# EAGLE board hand_rev_1_1_a (EAGLE 9.4.2)
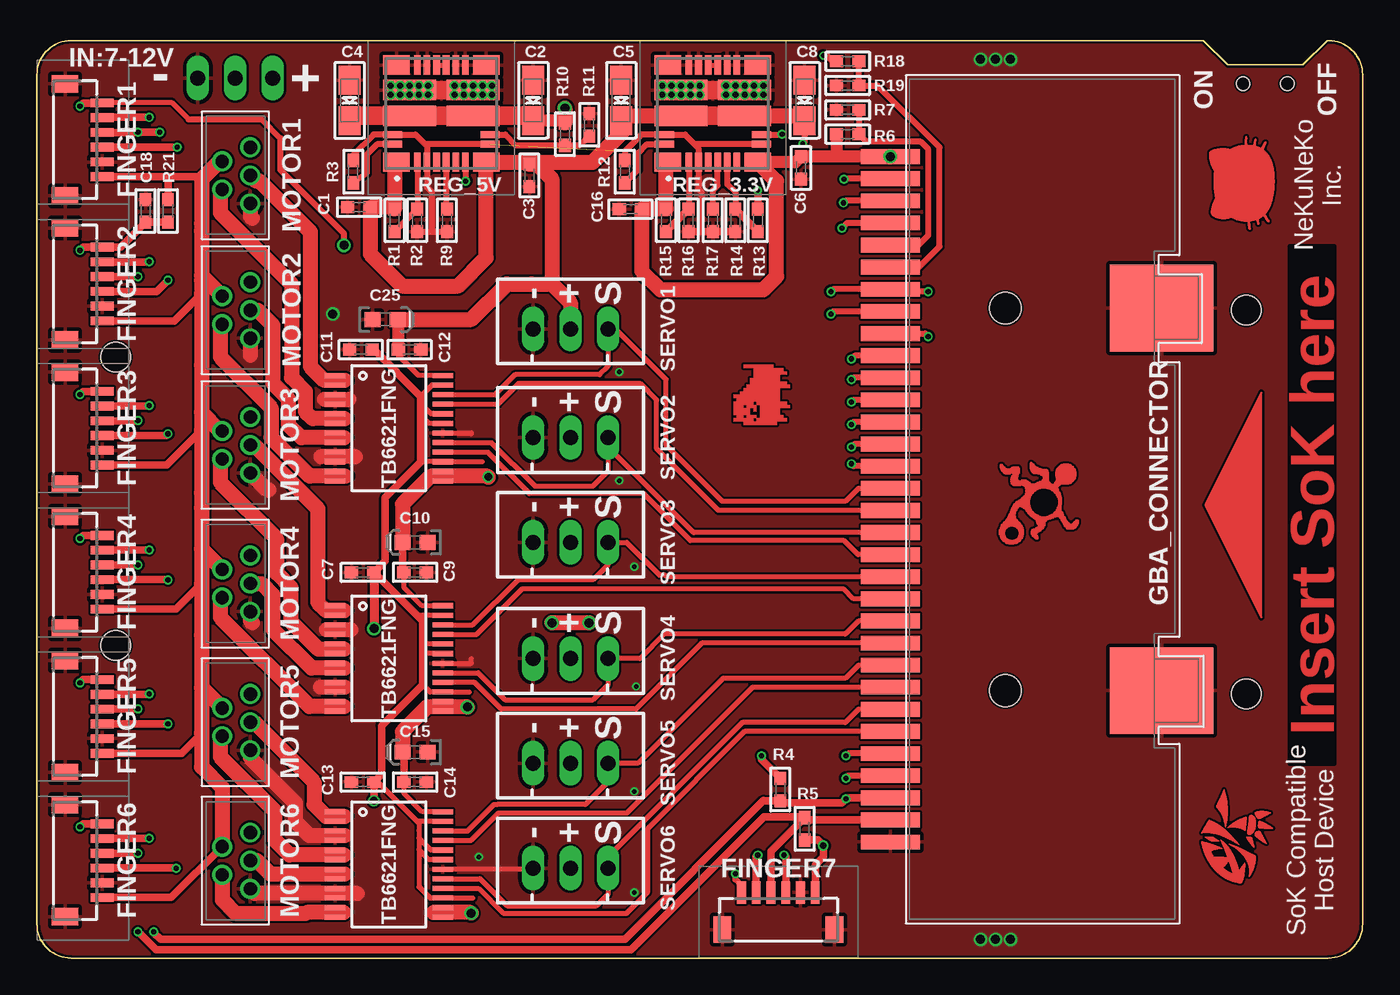
[diagram p0: board, top side]
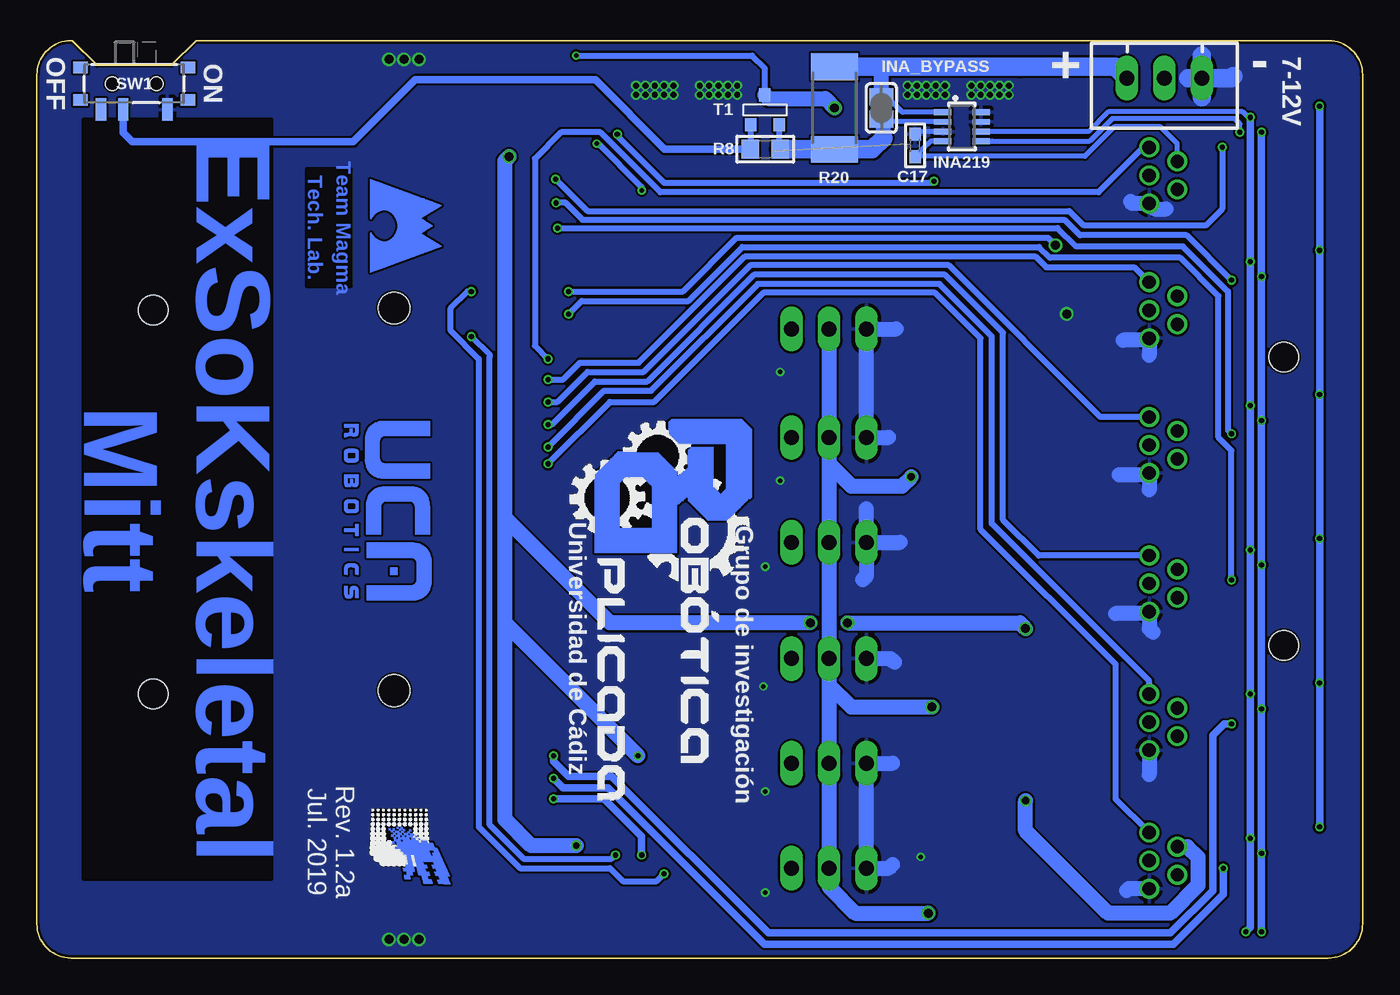
[diagram p1: board, bottom side, seen from below]

Size 89.92 x 62.23 mm. Coordinates in mm from the lower left corner, seen from the top.
Outline: 80.77,60.58 85.85,60.58 87.5,62.23 87.59,62.23 arc-90 89.92,59.91 89.92,2.32 arc-90 87.59,0 2.32,0 arc-90 0,2.32 0,59.91 arc-90 2.32,62.23 79.12,62.23 80.77,60.58
Copper layers (1*16): Top 0.035559375mm / dielectric 1.6mm / Bottom 0.035559375mm
Design rules "nekuneko": minimum track width 6mil, minimum drill 0.3mm, track to track 6mil, track to pad 6mil, pad to pad 6mil, via to via 6mil, smd to smd 6mil, copper to edge 6mil, drill to drill 6mil, minimum pad ring 5mil, minimum via ring 5mil, stop-mask expansion 2.5mil, vias tented up to drill 20mil, thermal gap 10mil
Net classes: 2 gnd: width 0.254 mm
Holes 2 mm at 82.04,43.94 82.04,17.91 5.33,21.21 5.33,40.77
tRestrict: 4 lines

## Footprints (pad centres in the part's own frame; a part is rotated, then mirrored left to right if it is on the bottom)
JST-XH-03-PACKAGE-LONG-PAD = drill 1.016 long: 1 -2.54,0; 2 0,0; 3 2.54,0
_0603 = smd 0.9 x 0.8: 1 -0.762,0; 2 0.762,0
EIA3216-18/A-R = smd 1.95 x 1.5: + 1.375,0; - -1.375,0
0603-POLAR = smd 1.1 x 1: + 0.85,0; - -0.85,0
MICROBUILDER__0603 = smd 0.9 x 0.8: 1 -0.762,0; 2 0.762,0
BM06BSRSSTBLFSN = smd 0.6 x 1.55: 1 -2.5,-1.65; 2 -1.5,-1.65; 3 -0.5,-1.65; 4 0.5,-1.65; 5 1.5,-1.65; 6 2.5,-1.65 | smd 1.2 x 1.8: MP1 -3.8,0.875; MP2 3.8,0.875
GBA_CARTRIDGE2 = smd 1 x 4: P$1 5.25,-1.3; P$2 6.75,-1.3; P$3 8.25,-1.3; P$4 9.75,-1.3; P$5 11.25,-1.3; P$6 12.75,-1.3; P$7 14.25,-1.3; P$8 15.75,-1.3; P$9 17.25,-1.3; P$10 18.75,-1.3; P$11 20.25,-1.3; P$12 21.75,-1.3; P$13 23.25,-1.3; P$14 24.75,-1.3; P$15 26.25,-1.3; P$16 27.75,-1.3; P$17 29.25,-1.3; P$18 30.75,-1.3; P$19 32.25,-1.3; P$20 33.75,-1.3; P$21 35.25,-1.3; P$22 36.75,-1.3; P$23 38.25,-1.3; P$24 39.75,-1.3; P$25 41.25,-1.3; P$26 42.75,-1.3; P$27 44.25,-1.3; P$28 45.75,-1.3; P$29 47.25,-1.3; P$30 48.75,-1.3; P$31 50.25,-1.3; P$32 51.75,-1.3 | smd 5.88 x 7: P$33 15.525,17.1; P$34 41.475,17.1 | hole 2.159: 41.475,6.504; 15.525,6.504
SOT23-8 = smd 0.4 x 1.2: 1 -0.975,-1.3; 2 -0.325,-1.3; 3 0.325,-1.3; 4 0.975,-1.3; 5 0.975,1.3; 6 0.325,1.3; 7 -0.325,1.3; 8 -0.975,1.3
SOLDERJUMPER_REFLOW_NOPASTE = smd 1.168 x 1.6: 1 -0.762,0; 2 0.762,0
5PIN = drill 0.9: 1 -1.905,0; 2 -0.953,1.905; 3 0,0; 4 0.953,1.905; 5 1.905,0
_0805 = smd 1.2 x 1.3: 1 -1.016,0; 2 1.016,0
2512 = smd 1.8 x 3.2: 1 -2.8,0; 2 2.8,0
TPSM84624MOLR = smd 1.3 x 1.8: 1 -3.3,3.05; 8 -3.3,-3.05; 13 3.3,-3.05; 20 3.3,3.05 | smd 1.3 x 0.45: 2 -3.3,1.625; 3 -3.3,0.975; 4 -3.3,0.325; 5 -3.3,-0.325; 6 -3.3,-0.975; 7 -3.3,-1.625; 14 3.3,-1.625; 15 3.3,-0.975; 16 3.3,-0.325; 17 3.3,0.325; 18 3.3,0.975; 19 3.3,1.625 | smd 0.45 x 1.3: 9 -2.075,-3.3; 10 -1.425,-3.3; 23 -1.425,3.3; 24 -2.075,3.3 | smd 1.4 x 3.6: 11 -0.15,-2.15; 12 1.6,-2.15; 21 1.6,2.15; 22 -0.15,2.15
SPDT_SMT_SSSS811101 = smd 0.7 x 1.5: A -2.25,1.75; B 0.75,1.75; C 2.25,1.75 | smd 1 x 0.8: SUP1 -3.65,1.1; SUP2 -3.65,-1.1; SUP3 3.65,1.1; SUP4 3.65,-1.1 | hole 0.9: -1.5,0; 1.5,0
SOT-23 = smd 0.787 x 0.889: 1 0.025,-1.016; 2 -0.94,1.016; 3 0.991,1.016
SSOP24 = smd 0.348 x 1.397: 1 -3.575,-3.656; 2 -2.925,-3.656; 3 -2.275,-3.656; 4 -1.625,-3.656; 5 -0.975,-3.656; 6 -0.325,-3.656; 7 0.325,-3.656; 8 0.975,-3.656; 9 1.625,-3.656; 10 2.275,-3.656; 11 2.925,-3.656; 12 3.575,-3.656; 13 3.575,3.656; 14 2.925,3.656; 15 2.275,3.656; 16 1.625,3.656; 17 0.975,3.656; 18 0.325,3.656; 19 -0.325,3.656; 20 -0.975,3.656; 21 -1.625,3.656; 22 -2.275,3.656; 23 -2.925,3.656; 24 -3.575,3.656

## Placement (x,y rotation side)
BATTERY  JST-XH-03-PIN-LONG-PAD  [JST-XH-03-PACKAGE-LONG-PAD]  13.46,59.69 180 bottom
C1  47uF  [_0603]  21.84,50.93 0 top
C2  10uF  [EIA3216-18/A-R]  33.66,58.17 270 top
C3  47uF  [_0603]  33.4,53.09 90 top
C4  10uF  [EIA3216-18/A-R]  21.21,58.17 270 top
C5  10uF  [EIA3216-18/A-R]  39.62,58.17 270 top
C6  47uF  [_0603]  51.82,53.59 90 top
C7  0.1uF  [_0603]  22.1,26.16 180 top
C8  10uF  [EIA3216-18/A-R]  52.07,58.17 270 top
C9  0.1uF  [_0603]  25.65,26.16 180 top
C10  10uF  [0603-POLAR]  25.65,28.19 180 top
C11  0.1uF  [_0603]  21.97,41.27 180 top
C12  0.1uF  [_0603]  25.27,41.27 180 top
C13  0.1uF  [_0603]  22.1,11.94 180 top
C14  0.1uF  [_0603]  25.65,11.94 180 top
C15  10uF  [0603-POLAR]  25.65,13.97 180 top
C16  47uF  [_0603]  40.26,50.8 0 top
C17  0.1uF  [_0603]  30.35,55.12 270 bottom
C18  1uF  [MICROBUILDER__0603]  7.37,50.67 270 top
C25  10uF  [0603-POLAR]  23.62,43.31 0 top
FINGER1  BM06B-SRSS-TB(LF)(SN)  [BM06BSRSSTBLFSN]  2.79,55.5 90 top
FINGER2  BM06B-SRSS-TB(LF)(SN)  [BM06BSRSSTBLFSN]  2.79,45.72 90 top
FINGER3  BM06B-SRSS-TB(LF)(SN)  [BM06BSRSSTBLFSN]  2.79,35.94 90 top
FINGER4  BM06B-SRSS-TB(LF)(SN)  [BM06BSRSSTBLFSN]  2.79,26.16 90 top
FINGER5  BM06B-SRSS-TB(LF)(SN)  [BM06BSRSSTBLFSN]  2.79,16.38 90 top
FINGER6  BM06B-SRSS-TB(LF)(SN)  [BM06BSRSSTBLFSN]  2.79,6.6 90 top
FINGER7  BM06B-SRSS-TB(LF)(SN)  [BM06BSRSSTBLFSN]  50.29,2.79 180 top
GBA_CONNECTOR  [GBA_CARTRIDGE2]  59.18,59.62 270 top
INA219  INA219BIDCNT  [SOT23-8]  27.18,56.39 270 bottom
INA_BYPASS  [SOLDERJUMPER_REFLOW_NOPASTE]  32.64,57.66 90 bottom
MOTOR1  Actuonix PQ12-100-06-P  [5PIN]  14.48,53.09 90 top
MOTOR2  Actuonix PQ12-100-06-P  [5PIN]  14.48,43.94 90 top
MOTOR3  Actuonix PQ12-100-06-P  [5PIN]  14.48,34.8 90 top
MOTOR4  Actuonix PQ12-100-06-P  [5PIN]  14.48,25.4 90 top
MOTOR5  Actuonix PQ12-100-06-P  [5PIN]  14.48,16 90 top
MOTOR6  Actuonix PQ12-100-06-P  [5PIN]  14.48,6.6 90 top
R1  10k  [_0603]  24.26,50.04 90 top
R2  1.37k  [_0603]  25.78,50.04 90 top
R3  40.2k  [_0603]  21.46,53.34 270 top
R4  4.7k  [_0603]  50.42,11.43 270 top
R5  4.7k  [_0603]  52.07,8.76 90 top
R6  10k  [_0603]  54.99,55.88 0 top
R7  33k  [_0603]  54.99,57.53 180 top
R8  10K  [_0805]  40.51,54.86 0 bottom
R9  4.42k  [_0603]  27.81,50.04 90 top
R10  68.1k  [_0603]  35.81,55.88 90 top
R11  16.9k  [_0603]  37.47,56.52 270 top
R12  48.7k  [_0603]  39.88,53.34 270 top
R13  27k  [_0603]  48.9,50.04 90 top
R14  6.2k  [_0603]  47.37,50.04 90 top
R15  10k  [_0603]  42.67,50.04 90 top
R16  2.21k  [_0603]  44.2,50.04 90 top
R17  4.42k  [_0603]  45.85,50.04 90 top
R18  51k  [_0603]  54.99,60.83 180 top
R19  33k  [_0603]  54.99,59.18 0 top
R20  0.1/1% (PT2512FK-070R1L)  [2512]  35.81,57.66 90 bottom
R21  10k  [_0603]  8.89,50.67 270 top
REG_3.3V  TPSM84624MOLR  [TPSM84624MOLR]  45.85,57.28 90 top
REG_5V  TPSM84624MOLR  [TPSM84624MOLR]  27.43,57.28 90 top
SERVO1  JST-XH-03-PIN-LONG-PAD  [JST-XH-03-PACKAGE-LONG-PAD]  36.2,42.67 0 top
SERVO2  JST-XH-03-PIN-LONG-PAD  [JST-XH-03-PACKAGE-LONG-PAD]  36.2,35.31 0 top
SERVO3  JST-XH-03-PIN-LONG-PAD  [JST-XH-03-PACKAGE-LONG-PAD]  36.2,28.19 0 top
SERVO4  JST-XH-03-PIN-LONG-PAD  [JST-XH-03-PACKAGE-LONG-PAD]  36.2,20.32 0 top
SERVO5  JST-XH-03-PIN-LONG-PAD  [JST-XH-03-PACKAGE-LONG-PAD]  36.2,13.21 0 top
SERVO6  JST-XH-03-PIN-LONG-PAD  [JST-XH-03-PACKAGE-LONG-PAD]  36.2,6.1 0 top
SW1  [SPDT_SMT_SSSS811101]  83.31,59.31 180 bottom
T1  DMP3098L-7  [SOT-23]  40.51,57.53 180 bottom
TB6621FNG  TB6621FNG  [SSOP24]  23.88,6.35 270 top
U1  TB6621FNG  [SSOP24]  23.88,35.94 270 top
U3  TB6621FNG  [SSOP24]  23.88,20.32 270 top
U$6  [NEKO_6_5_BORDE_TSTOP]  83.95,49.4 90 top
U$7  [SOK_FINISH]  84.07,4.95 90 top
U$8  [DOG_FINISH]  51.31,35.94 90 top
U$9  [MAGMA]  67.31,52.83 270 bottom
U$14  [UCAROBOTICS]  69.34,36.7 270 bottom
U$48  [GIRA_2_DRAWN_14]  54.36,36.7 270 bottom
U$50  [TRIANGLE]  79.25,30.73 0 top
U$51  [DIGIMON]  67.31,10.16 270 bottom
U$52  [BUGS_6]  70.87,27.81 90 top

## Library data of the parts
BATTERY SERVO1-SERVO6 = JST XH Connectors v1-0
C1-C9 C11-C14 C16 C17 INA219 INA_BYPASS R1-R21 SW1 = microbuilder
C10 C15 C25 = SparkFun-Capacitors; MPN: F981A106MMA; PROD_ID: CAP-13210
C18 = m0express
FINGER1-FINGER7 = 0SoK; DESCRIPTION: connector,multipole PCB use,BM06B-SRSS-T JST SH Series, 1mm Pitch 6 Way 1 Row Straight PCB Header, Solder Termination, 1A; HEIGHT: 4.25mm; MANUFACTURER_NAME: JST (JAPAN SOLDERLESS TERMINALS); MANUFACTURER_PART_NUMBER: BM06B-SRSS-TB(LF)(SN); RS_PART_NUMBER: 5468782; RS_PRICE-STOCK: https://uk.rs-online.com/web/p/products/5468782
GBA_CONNECTOR MOTOR1-MOTOR6 = 0SoK
REG_3.3V REG_5V = TPSM84624MOLR; DESCRIPTION: 4.5V to 17V Input, 0.6V-10V Output, 6A Power Module in Compact 7.5x7.5mm Footprint; HEIGHT: 5mm; MANUFACTURER_NAME: Texas Instruments; MANUFACTURER_PART_NUMBER: TPSM84624MOLR; MOUSER_PART_NUMBER: 595-TPSM84624MOLR
T1 = zetex; OC_FARNELL: unknown; OC_NEWARK: unknown
TB6621FNG U1 U3 = SparkFun
U$6-U$9 U$14 U$48 U$50-U$52 = 0Logos

## Nets
3.3V: C6.2 C7.1 C11.1 C13.1 C16.2 C17.2 FINGER1.1 FINGER2.1 FINGER3.1 FINGER4.1 FINGER5.1 FINGER6.1 FINGER7.1 GBA_CONNECTOR.P$1 INA219.4 MOTOR1.4 MOTOR2.4 MOTOR3.4 MOTOR4.4 MOTOR5.4 MOTOR6.4 R4.1 R5.1 R6.1 R15.2 R21.1 REG_3.3V.1 REG_3.3V.8 TB6621FNG.15 TB6621FNG.19 TB6621FNG.20 TB6621FNG.23 U1.15 U1.19 U1.20 U1.23 U3.15 U3.19 U3.20 U3.23
5.0V: C1.2 C3.2 C5.+ C8.+ C9.2 C10.+ C12.2 C14.2 C15.+ C25.+ R1.2 R13.2 REG_3.3V.11 REG_3.3V.22 REG_5V.1 REG_5V.8 SERVO1.2 SERVO2.2 SERVO3.2 SERVO4.2 SERVO5.2 SERVO6.2 TB6621FNG.13 TB6621FNG.14 TB6621FNG.24 U1.13 U1.14 U1.24 U3.13 U3.14 U3.24
AGND: R2.1 R3.1 R9.1 R12.1 R14.1 R16.1 R17.1 REG_3.3V.3 REG_3.3V.9 REG_3.3V.23 REG_5V.3 REG_5V.9 REG_5V.23
BATTERY_MONITOR: GBA_CONNECTOR.P$6 R18.1 R19.2
EN_3.3V: REG_3.3V.10 REG_5V.7
EN_5V: R10.1 R11.2 REG_5V.10
FB_3.3V: R15.1 R16.2 REG_3.3V.2
FB_5V: R1.1 R2.2 REG_5V.2
FINGER_!RESET: C18.2 FINGER1.6 FINGER2.6 FINGER3.6 FINGER4.6 FINGER5.6 FINGER6.6 FINGER7.6 GBA_CONNECTOR.P$7 R21.2
FINGER_INT1: FINGER1.3 GBA_CONNECTOR.P$2
FINGER_INT2: FINGER2.3 GBA_CONNECTOR.P$3
FINGER_INT3: FINGER3.3 GBA_CONNECTOR.P$4
FINGER_INT4: FINGER4.3 GBA_CONNECTOR.P$8
FINGER_INT5: FINGER5.3 GBA_CONNECTOR.P$28
FINGER_INT6: FINGER6.3 GBA_CONNECTOR.P$29
FINGER_INT7: FINGER7.3 GBA_CONNECTOR.P$9
GND [gnd]: BATTERY.1 C1.1 C2.- C3.1 C4.- C5.- C6.1 C7.2 C8.- C9.1 C10.- C11.2 C12.1 C13.2 C14.1 C15.- C16.1 C17.1 C18.1 C25.- FINGER1.2 FINGER1.MP1 FINGER1.MP2 FINGER2.2 FINGER2.MP1 FINGER2.MP2 FINGER3.2 FINGER3.MP1 FINGER3.MP2 FINGER4.2 FINGER4.MP1 FINGER4.MP2 FINGER5.2 FINGER5.MP1 FINGER5.MP2 FINGER6.2 FINGER6.MP1 FINGER6.MP2 FINGER7.2 FINGER7.MP1 FINGER7.MP2 GBA_CONNECTOR.P$32 GBA_CONNECTOR.P$33 GBA_CONNECTOR.P$34 INA219.3 INA219.7 INA219.8 MOTOR1.1 MOTOR2.1 MOTOR3.1 MOTOR4.1 MOTOR5.1 MOTOR6.1 R7.2 R11.1 R19.1 REG_3.3V.12 REG_3.3V.13 REG_3.3V.14 REG_3.3V.15 REG_3.3V.18 REG_3.3V.19 REG_3.3V.20 REG_3.3V.21 REG_5V.12 REG_5V.13 REG_5V.14 REG_5V.15 REG_5V.18 REG_5V.19 REG_5V.20 REG_5V.21 SERVO1.1 SERVO2.1 SERVO3.1 SERVO4.1 SERVO5.1 SERVO6.1 SW1.A TB6621FNG.3 TB6621FNG.4 TB6621FNG.9 TB6621FNG.10 TB6621FNG.18 U1.3 U1.4 U1.9 U1.10 U1.18 U3.3 U3.4 U3.9 U3.10 U3.18
MT1_POT: GBA_CONNECTOR.P$10 MOTOR1.5
MT1A: MOTOR1.2 U1.5 U1.6
MT1B: MOTOR1.3 U1.1 U1.2
MT2_POT: GBA_CONNECTOR.P$11 MOTOR2.5
MT2A: MOTOR2.2 U1.11 U1.12
MT2B: MOTOR2.3 U1.7 U1.8
MT3_POT: GBA_CONNECTOR.P$12 MOTOR3.5
MT3A: MOTOR3.2 U3.5 U3.6
MT3B: MOTOR3.3 U3.1 U3.2
MT4_POT: GBA_CONNECTOR.P$13 MOTOR4.5
MT4A: MOTOR4.2 U3.11 U3.12
MT4B: MOTOR4.3 U3.7 U3.8
MT5_POT: GBA_CONNECTOR.P$14 MOTOR5.5
MT5A: MOTOR5.2 TB6621FNG.5 TB6621FNG.6
MT5B: MOTOR5.3 TB6621FNG.1 TB6621FNG.2
MT6_POT: GBA_CONNECTOR.P$15 MOTOR6.5
MT6A: MOTOR6.2 TB6621FNG.11 TB6621FNG.12
MT6B: MOTOR6.3 TB6621FNG.7 TB6621FNG.8
N$1: R8.1 SW1.B T1.3
N$2: REG_5V.16 REG_5V.17
N$3: R12.2 REG_3.3V.24
N$4: REG_3.3V.16 REG_3.3V.17
N$6: R3.2 REG_5V.24
PWM_MT1A: GBA_CONNECTOR.P$17 U1.21
PWM_MT1B_SERVO1: GBA_CONNECTOR.P$16 SERVO1.3 U1.22
PWM_MT2A_SERVO2: GBA_CONNECTOR.P$18 SERVO2.3 U1.17
PWM_MT2B: GBA_CONNECTOR.P$19 U1.16
PWM_MT3A: GBA_CONNECTOR.P$21 U3.21
PWM_MT3B_SERVO3: GBA_CONNECTOR.P$20 SERVO3.3 U3.22
PWM_MT4A_SERVO4: GBA_CONNECTOR.P$22 SERVO4.3 U3.17
PWM_MT4B: GBA_CONNECTOR.P$23 U3.16
PWM_MT5A: GBA_CONNECTOR.P$25 TB6621FNG.21
PWM_MT5B_SERVO5: GBA_CONNECTOR.P$24 SERVO5.3 TB6621FNG.22
PWM_MT6A_SERVO6: GBA_CONNECTOR.P$26 SERVO6.3 TB6621FNG.17
PWM_MT6B: GBA_CONNECTOR.P$27 TB6621FNG.16
SCL: FINGER1.4 FINGER2.4 FINGER3.4 FINGER4.4 FINGER5.4 FINGER6.4 FINGER7.4 GBA_CONNECTOR.P$31 INA219.5 R5.2
SDA: FINGER1.5 FINGER2.5 FINGER3.5 FINGER4.5 FINGER5.5 FINGER6.5 FINGER7.5 GBA_CONNECTOR.P$30 INA219.6 R4.2
SOK: GBA_CONNECTOR.P$5 R6.2 R7.1
SS/TR_3.3V: R13.1 R14.2 REG_3.3V.6
TT_3.3V: R17.2 REG_3.3V.5
TT_5V: R9.2 REG_5V.5
VBAT: INA219.2 INA_BYPASS.1 R8.2 R20.1 T1.2
VIN: C2.+ C4.+ R10.2 R18.2 REG_5V.11 REG_5V.22 T1.1
VLIPO: BATTERY.3 INA219.1 INA_BYPASS.2 R20.2

## Tracks (layer width: path | path; a pad name or v marks a point on that pad's centre or on a via)
3.3V  (via drill 0.35, 0.45, 0.5, 0.61)
  Top 0.35: 26.16,20.83 26.16,18.54 26.66,18.05 U3.15 29.33,18.05 | 26.16,20.83 26.16,21.08 26.16,21.34 | 26.16,21.34 26.16,21.84 26.16,22.86 26.16,23.11 26.03,23.25 U3.23 | U3.20 26.2,21.3 26.16,21.34 | U3.19 26.34,20.64 26.16,20.83 | 27.43,38.87 U1.23 26.8,38.87 26.04,38.1 | C13.1 23.11,11.94 25.4,9.65 25.65,9.4 | 25.91,8.13 25.91,8.64 25.91,9.14 25.65,9.4 | 25.91,8.13 25.91,7.37 | 25.91,7.37 25.91,4.83 26.66,4.08 TB6621FNG.15 29.58,4.08 | TB6621FNG.19 26.6,6.67 25.91,7.37 | TB6621FNG.20 26.71,7.33 25.91,8.13 | TB6621FNG.23 25.78,9.28 25.65,9.4 | U1.20 26.71,36.92 26.04,37.59 | U1.19 26.6,36.27 26.04,36.83 | 26.04,33.66 26.05,33.67 U1.15 30.21,33.67
  Top 0.508: MOTOR6.4 9.12,4.1 FINGER6.1 | 10.92,14.99 11.18,15.24 9.82,13.88 FINGER5.1 | 11.18,25.4 10.92,25.15 9.46,23.69 9.44,23.66 FINGER4.1 | 8.89,53 8.76,53 8,53 7.11,53 FINGER1.1 | 8.89,53 11.53,53 MOTOR1.4 | MOTOR5.4 12.45,17.08 | 26.16,22.86 C7.1 23.62,26.92 23.62,31.24 26.04,33.66 26.04,36.83 26.04,37.59 26.04,38.1 22.86,41.27 C11.1 | 26.16,23.11 26.16,18.54 23.37,15.75 23.37,12.45 C13.1 v22.86,10.67 | v49.15,13.72 49.15,13.46 R4.1 | R5.1 52.96,8 v53.34,7.62 53.34,6.86 52.79,6.31 FINGER7.1 | 42.67,53.85 REG_3.3V.1 | R21.1 8.89,53 | FINGER2.1 9.31,43.22 11.18,45.09 | FINGER3.1 8.8,33.44 11.18,35.81 11.18,37.02
  Top 0.61: C7.1 v22.86,22.35
  Top 0.813: 49.4,53.85 49.03,53.85 REG_3.3V.8 51.44,53.98 C6.2 54.36,54.37 | GBA_CONNECTOR.P$1 54.36,54.37 | R6.1 54.23,54.49 54.36,54.37
  Top 1.016: MOTOR1.4 12.38,54.04 11.18,52.83 11.18,49.85 | 11.18,49.85 11.18,46.29 MOTOR2.4 | 11.18,49.85 11.18,49.34 | 11.18,49.34 11.18,45.97 11.18,45.09 | 11.18,49.34 11.18,44.96 11.18,37.02 12.45,35.75 MOTOR3.4 | 11.18,31.56 11.18,35.81 11.18,40.2 | 11.18,31.56 11.18,27.75 MOTOR4.4 | 11.18,31.56 11.18,30.54 11.18,25.4 11.18,21.91 11.18,18.35 | MOTOR5.4 11.3,18.22 11.18,18.35 | MOTOR6.4 12.57,11.56 11.18,12.95 11.18,15.24 11.18,18.35 | v37.47,22.73 v34.92,22.73 | 42.54,53.98 REG_3.3V.1 42.67,53.85 R15.2 C16.2 41.02,46.61 42.29,45.34 49.28,45.34 50.16,46.23 50.16,52.71 REG_3.3V.8 | REG_3.3V.8 49.02,54.1 | 49.02,54.1 REG_3.3V.8
  Bottom 0.35: MOTOR1.4 12.57,55.24 13.72,56.39 16.83,56.39 18.84,54.38 30.33,54.38 | 28.04,55.41 INA219.4 29.3,55.41 29.82,54.89 30.33,54.38 | 30.33,54.38 C17.2
  Bottom 1.016: v53.34,7.62 56.39,7.62 58.17,9.4 58.17,22.73 | v22.86,22.35 23.24,22.73 v34.92,22.73 | v37.47,22.73 51.05,22.73 58.17,29.84 | MOTOR6.4 11.87,7.56 11.18,6.86 11.18,4.92 13.05,3.05 17.27,3.05 22.86,8.64 v22.86,10.67 | 58.17,22.73 58.17,29.84 | v49.15,13.72 49.91,14.48 58.17,22.73 | 58.17,29.84 58.17,54.08 GBA_CONNECTOR.P$1
  other vias: 57.88,54.37
5.0V  (via drill 0.3, 0.51, 0.61)
  Top 0.35: TB6621FNG.13 27.23,2.77 26.9,3.1 27.2,3.1 TB6621FNG.14 | U3.13 27.21,17.07 26.75,17.07 | 26.75,17.07 26.5,17.07 | U3.14 27.2,17.07 26.75,17.07 | TB6621FNG.24 26.14,9.93 24.89,11.18 C14.2 | U1.24 25.89,39.52 24.51,40.89 C12.2 | U3.24 26.14,23.89 24.89,25.15 C9.2 | U1.14 30.23,33.02 30.56,32.69 30.68,32.56 30.62,32.63 | v30.61,32.64 30.61,32.37 U1.13
  Top 0.406: C8.+ 52.07,55.37 v51.94,55.24
  Top 0.508: C14.2 24.89,13.88 C15.+ | C9.2 24.8,26.25 C10.+ | 24.26,53.85 REG_5V.1 | R13.2 v48.9,52.07
  Top 0.813: C25.+ 24.93,43.31 24.51,42.97 C12.2
  Top 1.016: v29.46,3.05 29.41,3.1 26.9,3.1 | v29.21,17.02 29.16,17.07 26.75,17.07 | 26.5,17.07 24.8,15.37 C15.+ | C10.+ 24.8,30.78 26.71,32.69 30.56,32.69 | v30.61,32.64 30.62,32.63 | C25.+ 29.46,43.31 31.88,45.72 33.53,45.72 34.92,45.72 | C5.+ 39.62,55.9 37.7,53.98 33.53,53.98 C3.2 | 39.67,57.13 REG_3.3V.22 | 34.92,45.72 36.2,44.45 SERVO1.2 | REG_5V.8 | REG_5V.1 24.26,53.85 R1.2 24.13,50.93 C1.2 22.61,47.75 24.77,45.59 28.57,45.59 30.48,47.5 REG_5V.8 | REG_5V.8 | REG_5V.8 33.27,53.98 C3.2 | REG_3.3V.11 51.73,57.13 C8.+ | C3.2 33.91,53.85 34.92,52.83 34.92,45.72
  Top 1.27: 43.67,57.15 REG_3.3V.22 REG_3.3V.11 48.04,57.17 | C5.+ 39.67,57.13
  Bottom 0.406: v48.9,52.07 48.9,52.3 51.89,55.29 v51.94,55.24
  Bottom 1.016: SERVO4.2 SERVO5.2 SERVO6.2 36.2,4.83 34.42,3.05 v29.46,3.05 | SERVO4.2 SERVO3.2 36.2,33.53 | 36.2,33.53 36.2,34.29 36.2,34.54 36.2,35.05 SERVO2.2 SERVO1.2 | SERVO4.2 36.2,18.54 34.67,17.02 v29.21,17.02 | 36.2,33.53 34.67,32 31.24,32 v30.61,32.64
AGND  (1 unrouted)
  Top 0.406: 25.68,55.85 REG_5V.23 22.83,55.85 21.46,54.48 R3.1 | 25.68,55.85 26.46,55.08 REG_5V.3 26.46,52.28 26.8,51.94 26.8,49.28 | REG_5V.9 26.33,55.2 25.68,55.85 | 43.97,55.85 REG_3.3V.23 40.99,55.85 39.88,54.74 R12.1 | 43.97,55.85 44.87,54.95 REG_3.3V.3 44.87,52.16 45.09,51.94 45.09,49.28 | REG_3.3V.9 44.62,55.2 43.97,55.85 | R2.1 26.8,49.28 | 26.8,49.28 R9.1
  Top 0.508: R14.1 R17.1 45.09,49.28 R16.1
  pour Top (isolate 0.012): 23.5,52.83 23.5,47.75 25.02,46.23 28.32,46.23 29.84,47.75 29.84,53.09 23.75,53.09
  pour Top (isolate 0.012): 41.66,53.09 41.66,46.86 42.55,45.97 49.02,45.97 49.53,46.48 49.53,52.58 49.02,53.09
BATTERY_MONITOR
  Top 0.406: GBA_CONNECTOR.P$6 59.64,46.69 61.21,48.26 61.21,54.99 57.02,59.18 R19.2 R18.1
EN_3.3V  (via drill 0.35)
  Top 0.406: REG_5V.7 29.08,53.95 v29.08,52.7 | REG_3.3V.10 50.52,55.85 v50.55,55.88
  Bottom 0.406: v29.08,52.7 29.21,52.58 47.37,52.58 50.55,55.75 v50.55,55.88
EN_5V
  Top 0.406: REG_5V.10 31.78,55.85 32.51,55.12 R10.1 36.83,55.12 R11.2
FB_3.3V
  Top 0.406: REG_3.3V.2 44.22,50.83 R16.2
  Top 0.508: R15.1 R16.2
FB_5V
  Top 0.406: REG_5V.2 25.81,50.83 R2.2 R1.1
FINGER_!RESET  (via drill 0.35, 0.61)
  Top 0.35: FINGER1.6 4.48,58.04 9.14,58.04 10.29,56.9
  Top 0.406: 10.29,56.9 15.24,56.9 16.51,55.63 16.51,53.47 20.83,49.15 20.83,48.61 v20.83,48.35 | 47.79,4.91 47.37,5.33 v47.37,5.71 | v60.45,45.21 57.91,45.21 GBA_CONNECTOR.P$7 54,45.37 v53.85,45.21
  Top 0.508: R21.2 C18.2 5.67,48.22 FINGER2.6 3.13,48.22 v2.92,48.01 | v2.92,8.89 3.13,9.1 FINGER6.6 | FINGER5.6 3.13,18.88 v2.92,18.67 | FINGER4.6 3.13,28.66 v2.92,28.45 | FINGER3.6 3.13,38.44 v2.92,38.23 | v2.92,57.78 3.13,58 FINGER1.6 | 47.79,4.91 FINGER7.6
  Bottom 0.406: v20.83,48.35 21.34,48.86 28.5,48.86 42.45,48.86 46.1,45.21 v53.85,45.21 | v60.45,45.21 60.71,45.21 61.85,44.07 61.85,42.55 59.94,40.64 59.94,8.89 57.15,6.1 51.05,6.1 50.16,5.21 47.88,5.21 v47.37,5.71
  Bottom 0.508: v2.92,8.89 v2.92,18.67 v2.92,28.45 v2.92,38.23 v2.92,48.01 v2.92,57.78
FINGER_INT1  (via drill 0.35)
  Top 0.406: GBA_CONNECTOR.P$2 54.77,52.87 v54.74,52.83
  Top 0.508: FINGER1.3 9.52,55 v9.53,54.99
  Bottom 0.406: v9.53,54.99 9.53,50.8 10.64,49.68 18.9,49.68 19.89,50.67 52.58,50.67 v54.74,52.83
FINGER_INT2  (via drill 0.35)
  Top 0.406: 57.84,51.23 GBA_CONNECTOR.P$3 54.83,51.37 v54.69,51.23
  Top 0.508: FINGER2.3 8.14,45.22 v8.89,45.97
  Bottom 0.406: v54.69,51.23 54.06,51.23 52.91,50.08 20.24,50.08 19.18,49.02 11.94,49.02 v8.89,45.97
FINGER_INT3  (via drill 0.35)
  Top 0.406: GBA_CONNECTOR.P$4 54.95,49.87 v54.6,49.52
  Top 0.508: FINGER3.3 8.77,35.44 v8.89,35.56
  Bottom 0.406: v8.89,35.56 9.14,35.81 9.14,45.21 12.19,48.26 19.43,48.26 20.69,49.52 v54.6,49.52
FINGER_INT4  (via drill 0.35)
  Top 0.406: v8.89,25.65 8.88,25.66 | 57.88,43.69 GBA_CONNECTOR.P$8 54.02,43.87 v53.85,43.69
  Top 0.508: 8.88,25.66 FINGER4.3
  Bottom 0.406: v53.85,43.69 52.96,44.58 45.72,44.58 42.06,48.23 21.95,48.23 21.21,47.5 12.38,47.5 9.78,44.9 9.78,35.31 8.89,34.42 v8.89,25.65
FINGER_INT5  (via drill 0.35)
  Top 0.406: GBA_CONNECTOR.P$28 55.01,13.87 v54.86,13.72
  Top 0.508: FINGER5.3 8.76,15.88 v8.88,15.88 v8.89,15.88
  Bottom 0.508: v54.86,13.72 54.86,13.34 53.85,12.32 50.93,12.32 40.31,1.7 13.03,1.7 10.16,4.57 10.16,15.11 9.4,15.88 v8.89,15.88
FINGER_INT6  (via drill 0.35)
  Top 0.406: GBA_CONNECTOR.P$29 55.04,12.37 v54.86,12.19
  Top 0.508: 57.88,12.19 GBA_CONNECTOR.P$29 | FINGER6.3 v9.44,6.1 v9.45,6.1
  Bottom 0.508: v9.45,6.1 9.45,4.32 12.83,0.94 40.56,0.94 51.18,11.56 54.23,11.56 v54.86,12.19
FINGER_INT7  (via drill 0.35)
  Top 0.406: GBA_CONNECTOR.P$9 60.25,42.37 v60.45,42.16
  Top 0.508: FINGER7.3 50.79,6.87 v50.67,6.99
  Bottom 0.406: v50.67,6.99 50.93,6.73 56.92,6.73 59.21,9.02 59.21,40.79 59.21,40.92 v60.45,42.16
GND  (via drill 0.3, 0.4, 0.61)
  Top 0.254: U1.4 19.9,37.89 19.5,37.89 19.83,38.22 U1.3
  Top 0.35: TB6621FNG.3 20.57,8.62 20.89,8.3 20.57,7.97 TB6621FNG.4 | SERVO6.1 33.58,6.03 TB6621FNG.18 | U3.9 20.55,18.7 20.89,18.36 20.53,18.36 U3.10 | U3.18 29.46,20 29.46,20.32 | U1.18 29.46,35.62 29.46,35.57
  Top 1.016: MOTOR5.1 14.48,13.59 17.53,10.54 17.53,9.27 18.5,8.3 20.89,8.3 | 21.73,4.39 14.79,4.39 MOTOR6.1 | 14.48,23.11 MOTOR4.1 14.48,22.88 14.61,22.74 | 20.89,18.36 19.23,18.36 | MOTOR2.1 14.48,40.89 | 21.29,22.27 19.63,22.27 | 19.5,37.89 21.16,37.89 | 21.59,34 19.25,34 | MOTOR1.1 14.48,50.31 14.61,50.17 | MOTOR3.1 15.62,31.75 15.75,31.75
  Top 1.27: REG_5V.12 REG_5V.21 | REG_3.3V.12 REG_3.3V.21
  Bottom 0.35: INA219.3 30.17,56.06 C17.1
  Bottom 1.016: MOTOR6.1 15.88,4.7 16,4.57 | MOTOR5.1 14.48,12.45 | 14.22,22.1 14.48,22.35 MOTOR4.1 14.61,23.37 16.76,23.37 | 14.48,31.75 MOTOR3.1 14.61,32.77 16.51,32.77 | 14.48,40.89 MOTOR2.1 14.61,41.91 16.26,41.91 | SERVO4.1 32,20.32 31.75,20.07 | 31.88,13.21 SERVO5.1 SERVO6.1 32.13,6.1 31.88,6.35 | SERVO3.1 33.66,25.91 33.91,25.65 | SERVO3.1 31.37,28.19 | SERVO3.1 33.66,30.48 | 32.13,35.31 SERVO2.1 SERVO1.1 31.62,42.67 | 15.75,51.31 15.62,51.18 MOTOR1.1 14.1,50.8 13.34,50.8
  Bottom 1.27: BATTERY.1 8.89,59.69 8.76,59.82 | BATTERY.1 10.92,61.21 | BATTERY.1 10.92,58.4 | BATTERY.1 11.81,59.69
  other vias: 64.01,1.27 20.07,43.69 24,59.18 24,58.55 24.64,58.55 25.91,58.55 26.54,58.55 26.54,59.18 25.91,59.18 24.64,59.18 25.27,59.18 25.27,58.55 28.32,59.18 28.32,58.55 28.96,58.55 30.23,58.55 30.86,58.55 30.86,59.18 30.23,59.18 28.96,59.18 29.59,59.18 29.59,58.55 42.42,59.18 42.42,58.55 43.05,58.55 44.32,58.55 44.96,58.55 44.96,59.18 44.32,59.18 43.05,59.18 43.69,59.18 43.69,58.55 46.74,59.18 46.74,58.55 47.37,58.55 48.64,58.55 49.28,58.55 49.28,59.18 48.64,59.18 47.37,59.18 48.01,59.18 48.01,58.55 39.5,39.75 39.5,32.38 29.97,6.86 40.51,26.54 65.02,1.27 66.04,1.27 65.02,60.96 66.04,60.96 64.01,60.96 40.64,18.41 40.51,11.3 40.51,4.45
  pour Bottom (isolate 0.012): 0,0 89.92,0 89.92,62.23 0,62.23
  pour Top: 0,0 89.92,0 89.92,62.23 0,62.23
MT1_POT  (via drill 0.35)
  Top 0.406: GBA_CONNECTOR.P$10 55.47,40.87 v55.24,40.64
  Bottom 0.406: v55.24,40.64 56.13,41.53 56.13,54.23 54.36,56.01 51.69,56.01 47.62,51.94 17.91,51.94 14.86,54.99 MOTOR1.5
MT1A
  Top 0.305: U1.5 20.56,36.92 20.89,36.58 20.58,36.27 U1.6
  Top 1.016: MOTOR1.2 12.45,52.01 12.45,50.55 17.27,45.72 17.27,39.37 18.21,38.43 18.21,37.08 18.72,36.58 20.89,36.58
MT1B
  Top 0.305: U1.1 20.56,39.18 21.03,39.18 | 21.03,39.18 20.91,39.18 | U1.2 20.72,38.87 21.03,39.18
  Top 1.016: MOTOR1.3 14.87,52.7 15.11,52.7 18.54,49.26 18.54,40.13 19.49,39.18 20.91,39.18
MT2_POT  (via drill 0.35)
  Top 0.406: GBA_CONNECTOR.P$11 55.37,39.37 v55.24,39.24
  Bottom 0.406: MOTOR2.5 15.49,46.86 21.46,46.86 22.17,47.57 41.91,47.57 49.1,40.39 53.09,40.39 54.23,39.24 v55.24,39.24
MT2A
  Top 0.305: U1.11 20.59,33.02 20.93,32.68 20.53,32.68 U1.12
  Top 1.016: MOTOR2.2 12.45,42.86 12.45,40.77 15.88,37.34 15.88,35.31 18.5,32.68 20.93,32.68
MT2B
  Top 0.305: U1.7 20.54,35.62 20.86,35.29 20.54,34.97 U1.8
  Top 1.016: MOTOR2.3 14.99,43.94 16,42.93 16,38.99 17.04,37.95 17.04,36.2 17.95,35.29 20.86,35.29
MT3_POT  (via drill 0.35)
  Top 0.406: GBA_CONNECTOR.P$12 55.39,37.87 v55.24,37.72
  Bottom 0.406: MOTOR3.5 17.78,36.7 28.07,46.99 41.53,46.99 48.77,39.75 52.58,39.75 54.61,37.72 v55.24,37.72
MT3A
  Top 0.35: U3.6 20.54,20.64 20.85,20.96 20.52,21.3 U3.5
  Top 1.016: MOTOR3.2 12.45,33.72 12.45,32.26 16.26,28.45 16.26,26.11 17.22,25.14 17.22,22.82 19.09,20.96 20.85,20.96
MT3B
  Top 0.35: U3.1 20.52,23.89 20.86,23.56 20.54,23.56 U3.2
  Top 1.016: MOTOR3.3 14.73,34.8 19.05,30.48 19.05,24.13 19.62,23.56 20.86,23.56
MT4_POT  (via drill 0.35)
  Top 0.406: GBA_CONNECTOR.P$13 55.41,36.37 v55.24,36.2
  Bottom 0.406: MOTOR4.5 21.97,27.3 24.38,29.72 24.38,42.42 28.32,46.35 41.27,46.35 48.51,39.12 52.07,39.12 54.99,36.2 v55.24,36.2
MT4A
  Top 0.35: U3.11 20.55,17.07 20.86,17.07 20.54,16.75 U3.12
  Top 1.016: MOTOR4.2 12.45,24.32 12.45,23.11 18.49,17.07 20.86,17.07
MT4B
  Top 0.35: U3.8 20.57,19.34 20.89,19.67 20.57,20 U3.7
  Top 1.016: MOTOR4.3 15.24,25.4 16,24.64 16,22.29 18.62,19.67 20.89,19.67
MT5_POT  (via drill 0.35)
  Top 0.406: GBA_CONNECTOR.P$14 55.44,34.87 v55.24,34.67
  Bottom 0.406: MOTOR5.5 14.48,18.8 25.15,29.46 25.15,42.16 28.7,45.72 41.02,45.72 48.26,38.48 51.44,38.48 v55.24,34.67
MT5A
  Top 0.35: TB6621FNG.6 20.54,6.67 20.86,6.99 20.52,7.33 TB6621FNG.5
  Top 1.016: MOTOR5.2 12.45,14.92 12.45,13.65 16.13,9.97 16.13,8 17.14,6.99 20.86,6.99
MT5B
  Top 0.35: TB6621FNG.2 20.55,9.28 20.87,9.6 20.55,9.93 TB6621FNG.1
  Top 1.016: 20.87,9.6 19.61,9.6 18.8,10.41 18.8,11.94 14.73,16 MOTOR5.3
MT6_POT  (via drill 0.35)
  Top 0.406: GBA_CONNECTOR.P$15 55.41,33.37 v55.24,33.53
  Bottom 0.406: MOTOR6.5 16.76,10.79 16.76,19.94 25.91,29.08 25.91,42.04 29.01,45.14 40.64,45.14 48.06,37.72 51.05,37.72 v55.24,33.53
MT6A
  Top 0.35: TB6621FNG.12 20.53,3.09 20.83,3.09 20.56,3.09 TB6621FNG.11
  Top 1.016: MOTOR6.2 12.57,3.94 13.46,3.05 18.29,3.05 18.33,3.09 20.83,3.09
MT6B
  Top 0.35: TB6621FNG.7 20.54,6.03 20.88,5.69 20.56,5.38 TB6621FNG.8
  Top 1.016: MOTOR6.3 14.94,6.6 15.85,5.69 20.88,5.69
N$1
  Bottom 0.406: T1.3 41.53,56.49 R8.1
  Bottom 0.508: 84.06,57.14 SW1.B 84.06,55.99 83.44,55.37 68.45,55.37 64.26,59.56 52.04,59.56 47.34,54.86 R8.1
N$2
  Top 0.35: REG_5V.17 REG_5V.16
N$3
  Top 0.406: R12.2 40.77,53.47 40.77,54.61 41.36,55.2 REG_3.3V.24
N$4
  Top 0.35: REG_3.3V.17 REG_3.3V.16
N$6
  Top 0.406: REG_5V.24 23.07,55.2 22.35,54.48 22.35,53.21 R3.2
PWM_MT1A
  Top 0.35: U1.21 31.29,37.57 32.71,38.99 40.89,38.99 42.04,37.85 42.04,34.54 46.22,30.36 GBA_CONNECTOR.P$17
PWM_MT1B_SERVO1
  Top 0.35: U1.22 31.09,38.22 32.45,39.57 38.18,39.57 38.73,40.13 SERVO1.3 39.24,42.67 42.67,39.24 42.67,34.8 46.49,30.98 54.83,30.98 55.72,31.86 GBA_CONNECTOR.P$16
PWM_MT2A_SERVO2
  Top 0.35: 38.73,34.8 SERVO2.3 | SERVO2.3 38.73,33.02 37.72,32 33.78,32 30.82,34.97 U1.17 | SERVO2.3 38.73,34.67 41.97,31.43 | 41.97,31.43 42.67,30.73 | GBA_CONNECTOR.P$18 44.54,28.86 41.97,31.43
PWM_MT2B
  Top 0.35: U1.16 30.58,34.32 33.4,31.5 41.15,31.5 44.32,28.32 54.74,28.32 55.69,27.36 GBA_CONNECTOR.P$19
PWM_MT3A
  Top 0.35: U3.21 29.82,21.95 32.89,25.02 54.74,25.02 55.39,24.36 GBA_CONNECTOR.P$21
PWM_MT3B_SERVO3
  Top 0.35: U3.22 29.56,22.59 32.62,25.65 37.72,25.65 38.73,26.67 SERVO3.3 40.01,28.19 42.23,25.97 42.61,25.97 42.72,25.86 GBA_CONNECTOR.P$20
PWM_MT4A_SERVO4
  Top 0.35: U3.17 29.93,19.34 31.75,17.53 37.72,17.53 38.73,18.54 SERVO4.3 40.89,20.32 42.55,21.98 54.83,21.98 55.72,22.86 GBA_CONNECTOR.P$22
PWM_MT4B
  Top 0.35: U3.16 29.69,18.7 31.5,16.89 40.64,16.89 45.11,21.36 GBA_CONNECTOR.P$23
PWM_MT5A
  Top 0.35: TB6621FNG.21 29.44,7.97 31.29,9.82 40.01,9.82 48.55,18.36 GBA_CONNECTOR.P$25
PWM_MT5B_SERVO5
  Top 0.35: TB6621FNG.22 29.22,8.62 31,10.41 31.24,10.41 37.21,10.41 38.73,11.94 SERVO5.3 40.77,13.21 46.53,18.98 54.83,18.98 55.72,19.86 GBA_CONNECTOR.P$24
PWM_MT6A_SERVO6
  Top 0.35: SERVO6.3 38.73,6.6 | SERVO6.3 38.73,4.32 37.97,3.56 31.88,3.56 30.06,5.38 TB6621FNG.17 | SERVO6.3 38.73,6.86 47.85,15.98 54.83,15.98 55.72,16.86 GBA_CONNECTOR.P$26
PWM_MT6B
  Top 0.35: TB6621FNG.16 29.95,4.72 31.62,3.05 40.01,3.05 41.4,4.45 41.4,8.76 48,15.37 GBA_CONNECTOR.P$27
SCL  (via drill 0.35)
  Top 0.508: v6.86,1.78 8.08,0.56 40.31,0.56 49.32,9.57 52.03,9.57 R5.2 | R5.2 49.79,7.25 FINGER7.4 | GBA_CONNECTOR.P$31 52.23,9.37 R5.2 | FINGER6.4 4.45,7.11 v6.86,7.11 | v8.33,56.01 v6.86,56.01 v6.85,56 FINGER1.4 | FINGER2.4 v6.85,46.22 v6.86,46.23 | FINGER3.4 v6.85,36.44 v6.86,36.45 | FINGER4.4 v6.85,26.66 v6.86,26.67 | FINGER5.4 v6.85,16.88 v6.86,16.89
  Bottom 0.35: INA219.5 25.12,55.41 18.51,55.41 16.99,56.94 8.68,56.94 8.33,56.59 v8.33,56.01
  Bottom 0.508: v6.86,1.78 v6.86,7.11 v6.86,16.89 v6.86,26.67 v6.86,36.45 v6.86,46.23 v6.86,56.01
SDA  (via drill 0.35)
  Top 0.508: v7.92,1.78 7.92,1.73 8.38,1.27 39.88,1.27 49.29,10.69 49.31,10.67 R4.2 50.55,10.54 54.61,10.54 v54.86,10.79 54.93,10.87 GBA_CONNECTOR.P$30 57.83,10.92 | FINGER6.5 7.6,8.1 v7.62,8.13 | v7.62,57.02 4.47,57.02 FINGER1.5 | FINGER2.5 7.6,47.22 v7.62,47.24 | FINGER3.5 7.6,37.44 v7.62,37.47 | FINGER4.5 7.6,27.66 v7.62,27.69 | FINGER5.5 7.6,17.88 v7.62,17.91 | v48.9,6.99 48.77,6.86 48.77,4.47 FINGER7.5
  Bottom 0.35: INA219.6 18.57,56.06 17.2,57.44 8.16,57.44 7.75,57.02 v7.62,57.02
  Bottom 0.508: v54.86,10.79 51.44,10.79 48.9,8.26 v48.9,6.99 | v7.92,1.78 7.62,2.08 v7.62,8.13 v7.62,17.91 v7.62,27.69 v7.62,37.47 v7.62,47.24 v7.62,57.02
SOK
  Top 0.406: GBA_CONNECTOR.P$5 59.62,48.19 60.45,49.02 60.45,54.86 59.94,55.37 56.26,55.37 R6.2 R7.1
SS/TR_3.3V
  Top 0.406: REG_3.3V.6 46.82,52.49 47.37,51.94 R14.2
  Top 0.508: R14.2 R13.1
TT_3.3V
  Top 0.406: R17.2 45.85,52.07 46.17,52.4 REG_3.3V.5
TT_5V
  Top 0.406: REG_5V.5 27.76,50.86 R9.2
VBAT
  Bottom 0.35: INA219.2 32.2,56.71 32.38,56.9 32.51,56.9 INA_BYPASS.1
  Bottom 0.406: T1.2 39.57,54.94 R8.2
  Bottom 1.016: 32.51,55.63 32.51,56.9
  Bottom 1.27: R20.1 33.27,54.86 32.51,55.63 | R20.1 | R8.2 R20.1
VIN  (via drill 0.3, 0.6)
  Top 0.406: R18.2 53.98,60.83 53.59,61.21 v53.34,61.21
  Top 0.813: 25.26,57.15 REG_5V.22 | R10.2 35.66,56.79 C2.+
  Top 1.016: v35.81,57.66 R10.2
  Top 1.27: C4.+ 21.55,57.13 REG_5V.22 REG_5V.11 33.32,57.13 C2.+
  Bottom 0.406: v53.34,61.21 41.4,61.21 40.54,60.35 T1.1
  Bottom 1.016: T1.1 40.28,58.29 36.45,58.29 v35.81,57.66
VLIPO
  Bottom 0.35: INA219.1 31.2,57.36 32.26,58.42 INA_BYPASS.2
  Bottom 1.016: INA_BYPASS.2 32.64,60.33
  Bottom 1.27: BATTERY.3 16.77,60.46 23.24,60.46 32.77,60.46 | 32.77,60.46 R20.2 | 32.64,60.33 32.77,60.46

## Text on the board
Top: Insert SoK here
Bottom: Team Magma / Tech. Lab. | ExSoKskeletal / Mitt
tPlace: IN:7-12V | + | - | ON | OFF | NeKuNeKo / Inc. | - | + | S | - | + | S | - | + | S | - | + | S | - | + | S | - | + | S | SoK Compatible / Host Device
bPlace: + | - | 7-12V | ON | OFF | Rev. 1.2a / Jul. 2019
tNames: TB6621FNG | TB6621FNG | TB6621FNG
tStop: Insert SoK here
bStop: Team Magma / Tech. Lab. | ExSoKskeletal / Mitt